# Altium PCB MainDesign_Small.PcbDoc
Units mm, origin at the board's own origin, x right, y up, seen from the top; angles counter-clockwise.
Board outline 20.1 x 20.19 mm, 2 copper layers (Top Layer, Bottom Layer); 49 components, 40 nets, 203 pads, 51 vias.
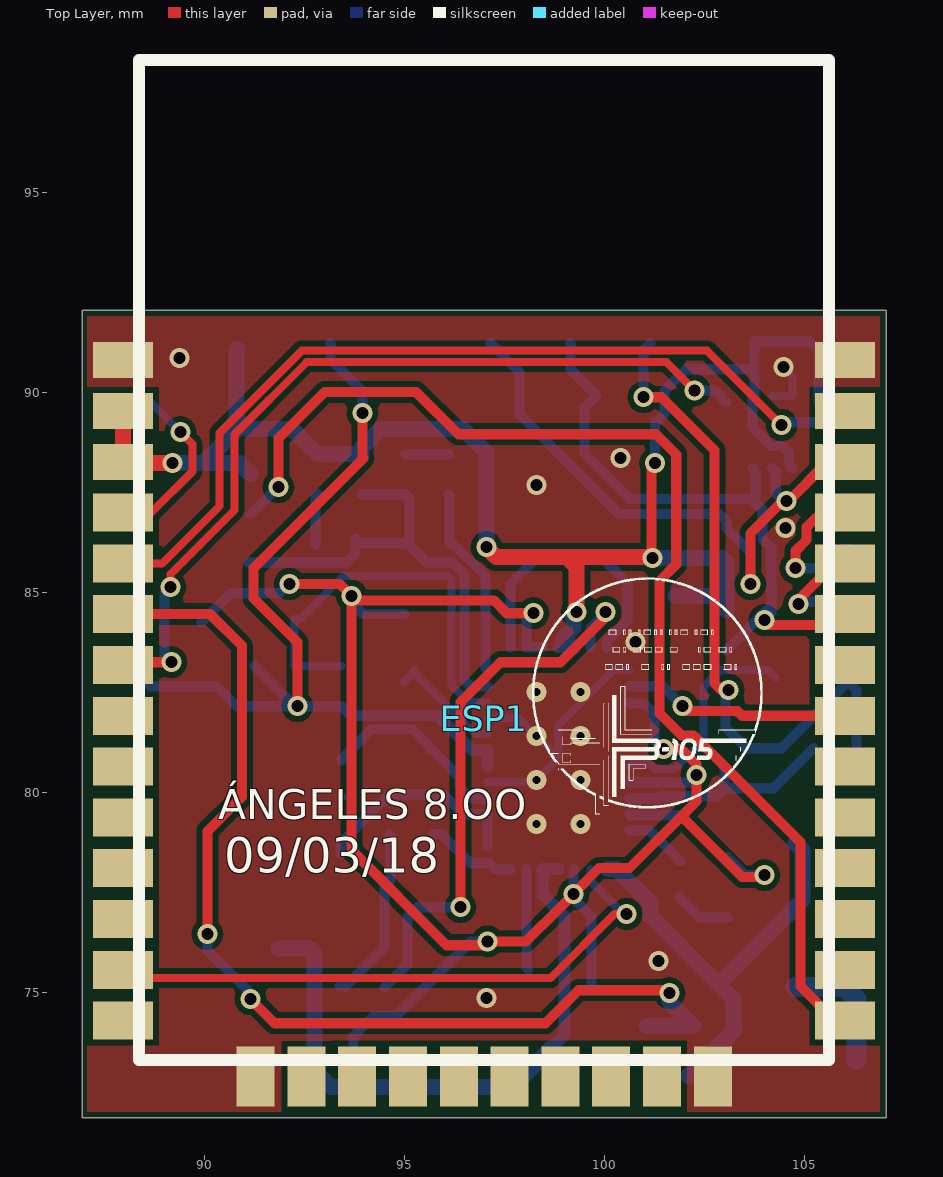
[diagram p0: Top Layer view]
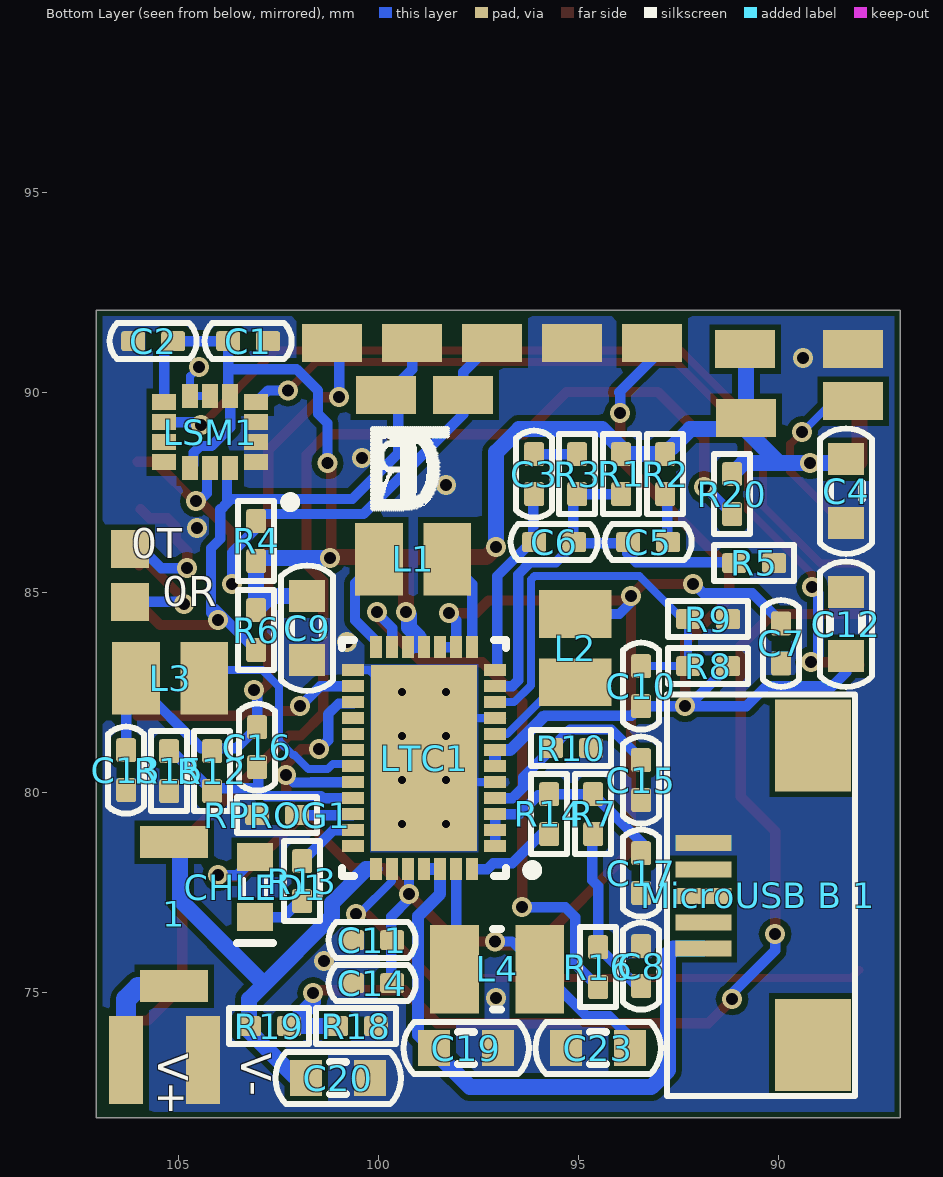
[diagram p1: Bottom Layer view, seen from below]
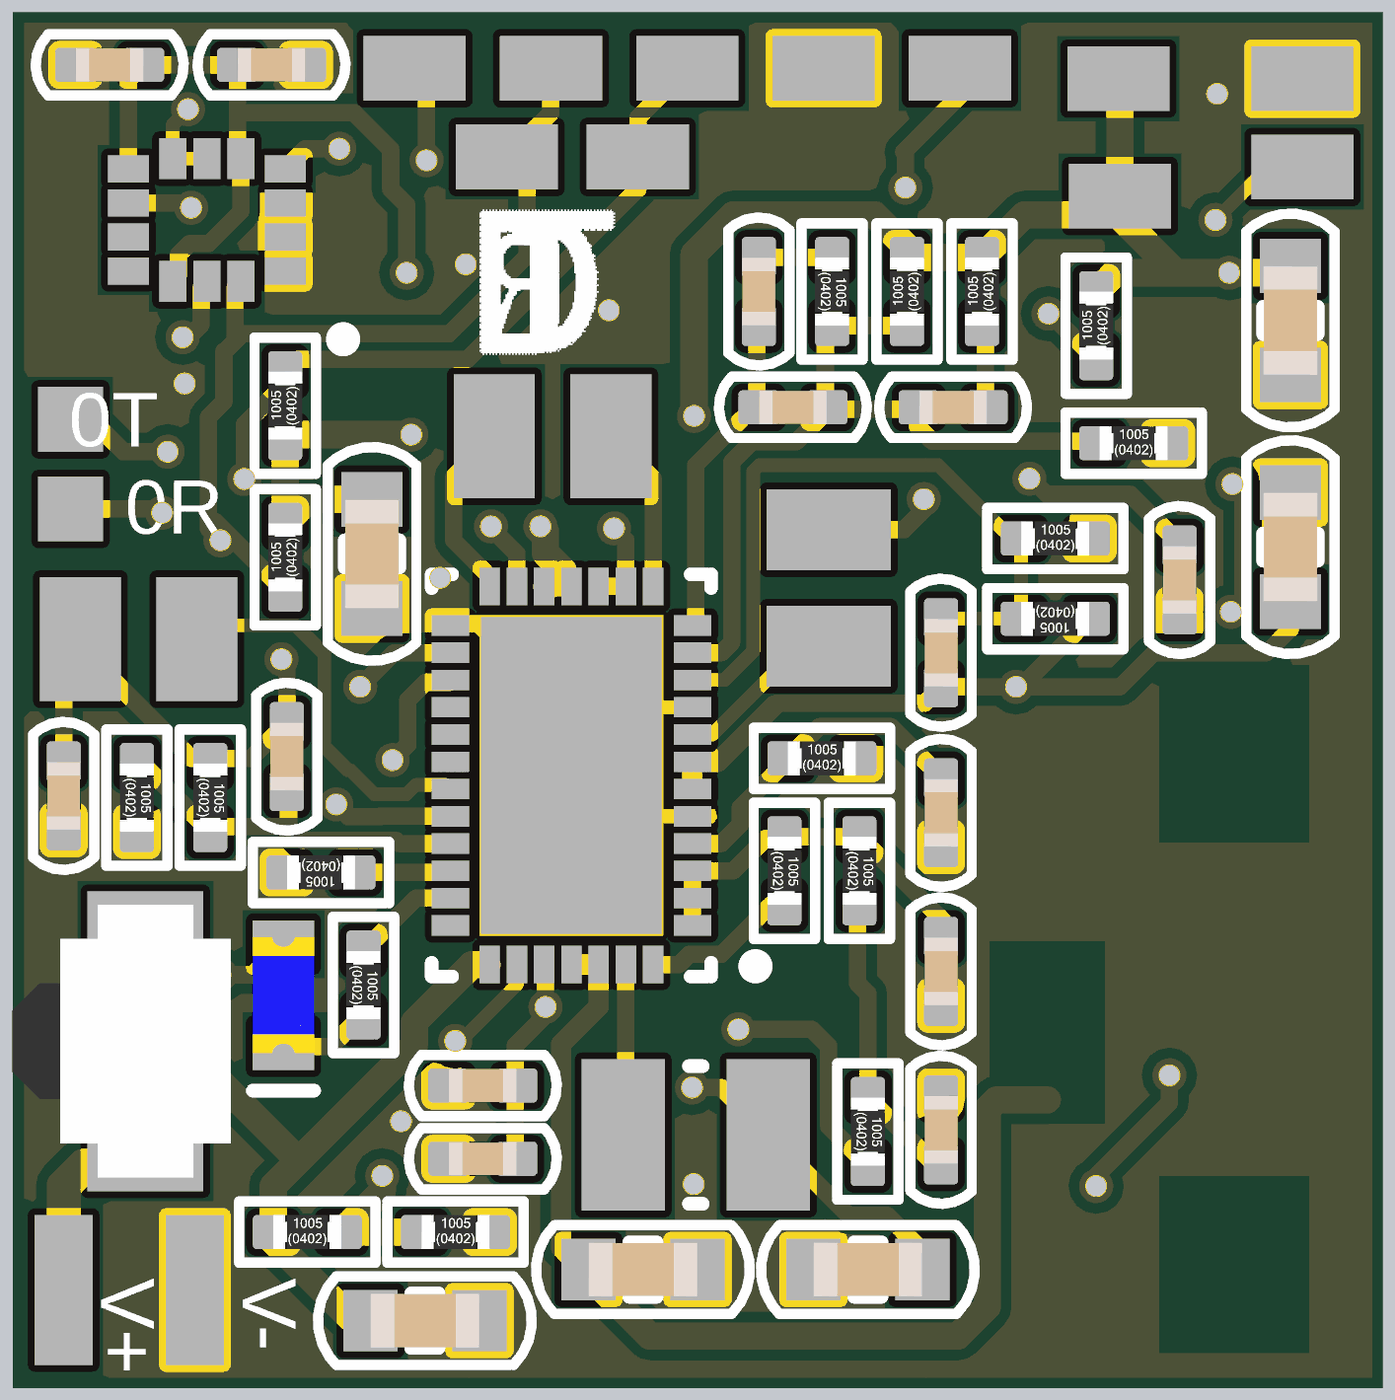
[diagram p2: 3D render of the assembled board from below, using the file's embedded part models]

## Layer stack, top to bottom
Top Solder: solder mask 0.0102, Solder Resist, Dk 3.5
Top Layer: signal copper 0.0356
Dielectric 1: dielectric 0.32, FR-4, Dk 4.8
Bottom Layer: signal copper 0.0356
Bottom Solder: solder mask 0.0102, Solder Resist, Dk 3.5

## Board outline
86.944,71.857 86.944,92.05 107.048,92.05 107.048,71.857

## Design rules (kind name [scope] priority, off if disabled: settings)
Clearance [All] p1: gap=0.15 ignorepadtopadclearanceinfootprint=TRUE except(0: Arc-Hole Track-Hole SMDPad-Hole THPad-Hole Via-Hole Fill-Hole Poly-Hole Region-Hole Text-Hole; 0.09: Arc-Arc Arc-Track Arc-SMDPad Track-Track Track-SMDPad SMDPad-SMDPad)
ComponentClearance VbatClearance [InComponent('10114830')] p1: gap=0.01 collisioncheckmode=3 verticalgap=0.01 showdistances=FALSE
ComponentClearance ComponentClearance_1 [All] p2: gap=0.254 collisioncheckmode=3 verticalgap=0.254 showdistances=FALSE
HoleSize [All] p1: absolutevalues=TRUE maxlimit=6.3 minlimit=0.3 maxpercent=80.000 minpercent=20.000
MinimumSolderMaskSliver [All] p1: minsoldermaskwidth=0.05
PolygonConnect [All] p1: connectstyle=Direct reliefconductorwidth=0.25 reliefentries=4 polygonreliefangle="90 Angle" airgapwidth=0.3
RoutingVias [All] p1: holewidth=0.3 width=0.6 viastyle="Through Hole" minholewidth=0.3 minwidth=0.6 maxholewidth=6.3 maxwidth=10.6
SilkToSilkClearance [All] p1: silktosilkclearance=0
SilkToSolderMaskClearance [IsPad] p1: minsilkscreentomaskgap=0 clearancetoexposedcopper=TRUE
SolderMaskExpansion [All] p1: expansion=0.102
Width [All] p1: maxlimit=10 minlimit=0.15 preferedwidth=0.25
25 further rules are at their usual default settings.

## Components (designator, comment, footprint, x,y, rotation, side; value= is the part's Value field where it differs from the comment)
1 "B3U-3000P" B3U-3000P 106.05,76.775 r90 bottom
C1 "Cap" "0402 CAP" 103.25,91.275 r0 bottom value=100n (schematic designator C4)
C2 "Cap" "0402 CAP" 105.625,91.275 r180 bottom value=100n (schematic designator C3)
C3 "Cap" "0402 CAP" 96.1,87.95 r270 bottom value=330p (schematic designator C19)
C4 "Cap" "0603 Cap" 88.3,87.525 r90 bottom value=100u (schematic designator C5)
C5 "Cap" "0402 CAP" 93.25,86.25 r0 bottom value=33p (schematic designator C23)
C6 "Cap" "0402 CAP" 95.6,86.25 r0 bottom value=10p (schematic designator C20)
C7 "Cap" "0402 CAP" 89.925,83.717 r90 bottom value=2.2u (schematic designator C22)
C8 "Cap" "0402 CAP" 93.425,75.65 r270 bottom value=100n
C9 "Cap" "0603 Cap" 101.775,84.1 r90 bottom value=100u (schematic designator C21)
C10 "Cap" "0402 CAP" 93.425,82.65 r270 bottom value=10p (schematic designator C16)
C11 "Cap" "0402 CAP" 100.15,76.3 r0 bottom value=1u (schematic designator C18)
C12 "Cap" "0603 Cap" 88.3,84.2 r270 bottom value=100u (schematic designator C15)
C13 "Cap" "0402 CAP" 106.3,80.55 r90 bottom value=10u (schematic designator C14)
C14 "Cap" "0402 CAP" 100.15,75.225 r180 bottom value=10u (schematic designator C17)
C15 "Cap" "0402 CAP" 93.425,80.3 r90 bottom value=100n (schematic designator C12)
C16 "Cap" "0402 CAP" 103.025,81.125 r90 bottom value=10p (schematic designator C13)
C17 "Cap" "0402 CAP" 93.425,77.975 r90 bottom value=1u (schematic designator C11)
C19 "Cap" "0603 Cap" 97.8,73.6 r0 bottom value=100u (schematic designator C6)
C20 "Cap" "0603 Cap" 101,72.85 r180 bottom value=100u (schematic designator C9)
C23 "Cap" "0603 Cap" 94.5,73.6 r180 bottom value=100u (schematic designator C7)
CHLED1 "LED" "0603 LED-BLUE" 103.075,77.625 r270 bottom
ESP1 "ESP32" ESP32 94.97,85.8 r0 top locked
L1 "L?" "Inductor 0806 [2016]" 99.125,85.825 r0 bottom value=2.2u (schematic designator L4)
L2 "L?" "Inductor 0806 [2016]" 95.075,83.6 r90 bottom value=2.2u (schematic designator L3)
L3 "L?" "Inductor 0806 [2016]" 105.2,82.85 r0 bottom value=4.7u (schematic designator L2)
L4 "L?" "Inductor 1008 [2520]" 97.025,75.575 r180 bottom value=3.3u (schematic designator L1)
LSM1 "LSM6DS3" LSM6DS3 104.2,89 r0 bottom
LTC1 "LTC3586" LTC3586/LTC3586-1 98.85,80.85 r0 bottom
"MicroUSB B 1" "MicroUSB B 2.0" "MicroUSB B 2.0" 188.261,172.608 r90 bottom (schematic designator "MicroUSB B 2.0")
R1 "Res" "0402 Res" 93.925,87.95 r90 bottom value=324K (schematic designator R18)
R2 "Res" "0402 Res" 92.825,87.95 r90 bottom value=121K (schematic designator R20)
R3 "Res" "0402 Res" 95.025,87.95 r270 bottom value=15K (schematic designator R17)
R4 "Res" "0402 Res" 103.05,86.275 r90 bottom value=1K (schematic designator R1)
R5 "Res" "0402 Res" 90.6,85.725 r180 bottom value=105K (schematic designator R19)
R6 "Res" "0402 Res" 103.05,84.05 r90 bottom value=1K (schematic designator R3)
R7 "Res" "0402 Res" 94.625,79.45 r270 bottom value=1K (schematic designator R2)
R8 "Res" "0402 Res" 91.75,83.15 r0 bottom value=88k7 (schematic designator R14)
R9 "Res" "0402 Res" 91.75,84.325 r180 bottom value=16k9 (schematic designator R16)
R10 "Res" "0402 Res" 95.175,81.1 r180 bottom value=2K87 (schematic designator R12)
R12 "Res" "0402 Res" 104.15,80.525 r270 bottom value=1M02 (schematic designator R13)
R13 "Res" "0402 Res" 101.9,77.775 r270 bottom value=1K (schematic designator R8)
R14 "Res" "0402 Res" 95.725,79.45 r270 bottom value=10K (schematic designator R6)
R15 "Res" "0402 Res" 105.225,80.525 r270 bottom value=806K
R16 "Res" "0402 Res" 94.5,75.625 r270 bottom value=0 (schematic designator R9)
R18 "Res" "0402 Res" 100.55,74.15 r180 bottom value=4K3 (schematic designator R5)
R19 "Res" "0402 Res" 102.725,74.15 r180 bottom value=10K (schematic designator R4)
R20 "Res" "0402 Res" 91.15,87.45 r90 bottom value=0 (schematic designator R10)
RPROG1 "Res" "0402 Res" 102.525,79.425 r0 bottom value=3K57

## Footprints (in the part's own frame and the unit in brackets; to place one, negate y for a bottom-side part, rotate by r counter-clockwise, add the part's x,y. Pads: shape width x height; smd on the part's side, far side on the other; paste and mask are expansions set on the pad)
"0402 CAP" [mm] "Chip Capacitor, Body 1.0x0.5mm, IPC High Density"
  rrect25% 0.6x0.5 smd: 1(-0.5,0) 2(0.5,0)
  Top Layer pour cut-out: -0.2,0.25 -0.2,-0.25 0.2,-0.25 0.2,0.25
  silkscreen extent -1.09,-0.45 1.09,0.45, body extent -0.5,-0.25 0.5,0.25, height 0.49
"0402 Res" [mm] "Chip Resistor, Body 1.0x0.5mm, IPC High Density"
  rrect25% 0.6x0.5 smd: 1(-0.5,0) 2(0.5,0)
  Top Layer pour cut-out: -0.2,0.25 -0.2,-0.25 0.2,-0.25 0.2,0.25
  silkscreen extent -1,-0.45 1,0.45, body extent -0.5,-0.25 0.5,0.25, height 0.35
"0603 Cap" [mm] "Chip Capacitor, Body 1.6x0.8mm, IPC High Density"
  rect 0.8x0.9 smd: 1(-0.8,0) 2(0.8,0)
  silkscreen extent -1.57,-0.65 1.57,0.65, body extent -0.8,-0.4 0.8,0.4, height 0.78
"0603 LED-BLUE" [mm] "LED, Body 1.6x0.8mm, IPC High Density"
  rect 0.7x0.9 smd: 1(-0.75,0) 2(0.75,0)
  silkscreen extent -0.2,-0.45 1.4,0.45, body extent -0.85,-0.45 0.85,0.45, height 0.9
B3U-3000P [mm]
  rect 0.8x1.7 smd: 1(1.975,-0.95) 2(-1.625,-0.95)
  body extent -1.82,-2.2 2.18,1, height 1.2
ESP32 [mm]
  rect 1.5x0.9 smd: 1(-7,5) 2(-7,3.73) 3(-7,2.46) 36(11.05,2.46) 37(11.05,3.73) 38(11.05,5)
  rect 1.5x0.95 smd: 4(-7,1.19) 5(-7,-0.08) 6(-7,-1.35) 7(-7,-2.62) 8(-7,-3.89) 9(-7,-5.16) 10(-7,-6.43) 11(-7,-7.7) 12(-7,-8.97) 13(-7,-10.24) 14(-7,-11.51) 25(11.05,-11.51) 26(11.05,-10.24) 27(11.05,-8.97) 28(11.05,-7.7) 29(11.05,-6.43) 30(11.05,-5.16) 31(11.05,-3.89) 32(11.05,-2.62) 33(11.05,-1.35) 34(11.05,-0.08) 35(11.05,1.19)
  rect 0.95x1.5 smd: 15(-3.69,-12.91) 16(-2.42,-12.91) 17(-1.15,-12.91) 18(0.12,-12.91) 19(1.39,-12.91) 20(2.66,-12.91) 21(3.93,-12.91) 22(5.2,-12.91) 23(6.47,-12.91) 24(7.74,-12.91)
  silkscreen extent -6.6,-12.5 10.65,12.5, body extent -6.63,-12.5 10.68,12.55, height 2
"Inductor 0806 [2016]" [mm]
  rect 1.19x1.82 smd: 1(-0.855,0) 2(0.855,0)
  body extent -1.1,-0.9 1.1,0.9, height 1
"Inductor 1008 [2520]" [mm]
  rect 1.22x2.22 smd: 1(-1.065,0) 2(1.065,0)
  silkscreen extent -0.1,-1.01 0.1,1.01, body extent -1.3,-1.1 1.3,1.1, height 1
LSM6DS3 [mm]
  rect 0.6x0.4 smd: 1(-1.15,0.75) 2(-1.15,0.25) 3(-1.15,-0.25) 4(-1.15,-0.75) 8(1.15,-0.75) 9(1.15,-0.25) 10(1.15,0.25) 11(1.15,0.75)
  rect 0.4x0.6 smd: 5(-0.5,-0.9) 6(0,-0.9) 7(0.5,-0.9) 12(0.5,0.9) 13(0,0.9) 14(-0.5,0.9)
  silkscreen extent -2.12,1.63 -1.88,1.87, body extent -1.55,-1.3 1.55,1.3, height 0.86
LTC3586/LTC3586-1 [mm]
  rect 0.55x0.3 smd: 1(-1.775,2.2) 2(-1.775,1.8) 3(-1.775,1.4) 4(-1.775,1) 5(-1.775,0.6) 6(-1.775,0.2) 7(-1.775,-0.2) 8(-1.775,-0.6) 9(-1.775,-1) 10(-1.775,-1.4) 11(-1.775,-1.8) 12(-1.775,-2.2) 20(1.775,-2.2) 21(1.775,-1.8) 22(1.775,-1.4) 23(1.775,-1) 24(1.775,-0.6) 25(1.775,-0.2) 26(1.775,0.2) 27(1.775,0.6) 28(1.775,1) 29(1.775,1.4) 30(1.775,1.8) 31(1.775,2.2)
  rect 0.3x0.55 smd: 13(-1.2,-2.775) 14(-0.8,-2.775) 15(-0.4,-2.775) 16(0,-2.775) 17(0.4,-2.775) 18(0.8,-2.775) 19(1.2,-2.775) 32(1.2,2.775) 33(0.8,2.775) 34(0.4,2.775) 35(0,2.775) 36(-0.4,2.775) 37(-0.8,2.775) 38(-1.2,2.775)
  rect 2.65x4.65 smd: 39(0,0)
  silkscreen extent -2.82,-2.95 2.05,2.95, body extent -2.05,-2.95 2.05,2.95, height 0.8
"MicroUSB B 2.0" [mm]
  rect 2.3x1.9 smd: 0(-98.933,-99.136) 0(-91.44,-99.136)
  rect 0.4x1.4 smd: 1(-96.52,-96.393) 2(-95.86,-96.393) 3(-95.199,-96.393) 4(-94.539,-96.393) 5(-93.878,-96.393)
  silkscreen extent -100.2,-100.18 -90.17,-95.48, body extent -99.6,-101.99 -90.8,-96.39, height 2.89

## Part data
L1 L2 L3 L4: library part Ind
LSM1: Supplier Part Number 1=497-15383-1-ND, Supplier 1=Digi-Key
LTC1: library part LTC3586/LTC3586-1

## Free pads (board coordinates)
  rect 1.5x0.95 smd far side: 5(88.125,89.775) 5(88.125,91.075) 5(90.8,89.35) 5(90.825,91.075) 5(93.15,91.225) 5(95.15,91.225) 5(97.15,91.225) 5(97.875,89.925) 5(99.15,91.225) 5(99.8,89.925) 5(101.15,91.225)
  rect 0.95x0.95 smd far side: 5(106.2,84.76) 5(106.2,86.075)
  rect 0.85x2.2 smd far side: 6(104.375,73.3) 7(106.3,73.3)

## Via types
v1: diameter 0.5, hole 0.3, Top Layer to Bottom Layer, tented both sides, 43 vias
v2: diameter 0.5, hole 0.2, Top Layer to Bottom Layer, tented top, 8 vias

## Nets (pads, with @x,y where several pads share a name; then routed paths per layer and width w, separated by ;. In a path a pad name is that pad's centre, name@x,y a point inside that pad or via, vN(x,y) a via of type N, cw(c..) or ccw(c..) an arc to the next point about the centre after c; other vN are vias at no path point)
1.8V: C13.2 C16.2 L3.2 pad.5@101.15,91.225 R12.1 | length 16.8
  Top Layer w0.254: v1(100.975,89.875) 101.425,89.875 102.75,88.55 102.75,82.725 102.921,82.554 v1(103.105,82.554)
  Bottom Layer w0.254: v1(100.975,89.875) 100.975,91.05 pad.5@101.15,91.225 ; v1(103.105,82.554) 103.025,82.474 C16.2 103.55,81.1 104.425,81.1 106.005,82.68 106.005,82.85 106.3,82.555 C13.2@106.3,81.125
3.3V: C1.2 C2.2 C4.2 C9.2 ESP1.2 ESP1.3 LSM1.5 LSM1.8 LSM1.12 LTC1.16 LTC1.17 pad.5@90.8,89.35 pad.5@90.825,91.075 R1.2 R2.2 R4.1 R6.2 R20.2 | length 43.2
  Top Layer w0.254: v1@101.175,85.875 101.175,88.133 v1(101.267,88.225)
  Top Layer w0.4: ESP1.2 ESP1.3 88.005,88.225 v1(89.2,88.225) ; v1(97.05,86.125) 97.3,85.875 99.238,85.875 ; v1(99.305,84.504) 99.305,85.633 99.15,85.787 99.238,85.875 ; v1@101.175,85.875 99.238,85.875
  Bottom Layer w0.254: LTC1.17@99.21,83.625 LTC1.17 ; v1(101.267,88.225) 101.267,89.222 101.502,89.457 101.502,90.037 102.04,90.575 103.75,90.575 ; LSM1.12 104.617,88.183 104.617,88.49 104.455,88.652 104.173,88.652 103.7,89.125 LSM1.5 103.75,89.95 103.75,90.575 ; LSM1.8 105.35,91.05 C2.2 C1.2 103.75,90.575
  Bottom Layer w0.3: LTC1.16 LTC1.17@99.21,83.625
  Bottom Layer w0.4: C4.2 88.4,88.225 v1(89.2,88.225) 90.075,88.225 ; pad.5@90.825,91.075 90.8,91.05 pad.5@90.8,89.35 ; R20.2 90.875,88.225 90.075,88.225 ; R2.2@92.675,88.6 92.2,89.075 91.075,89.075 pad.5@90.8,89.35 ; R2.2 R1.2 ; R1.2@93.95,88.626 94.399,89.075 96.475,89.075 97.05,88.5 v1(97.05,86.125) ; LTC1.17@99.21,83.625 98.975,83.86 99.233,84.118 99.233,84.432 v1(99.305,84.504) ; v1(101.2,85.85) 102.95,85.85 103.05,85.75 R6.2 102.7,84.9 C9.2 ; 90.075,88.225 90.025,88.275 90.8,89.05 pad.5@90.8,89.35
5V: C10.2 C12.2 LTC1.6 LTC1.7 pad.5@93.15,91.225 R8.1 | length 22.8
  Top Layer w0.254: v1(92.325,82.15) 92.325,83.75 91.225,84.85 91.225,85.6 93.975,88.35 93.95,88.375 v1(93.95,89.475)
  Bottom Layer w0.254: C12.2 88.3,83 88.65,82.65 90.3,82.65 90.8,82.15 v1@92.25,82.15 ; R8.1 v1@92.25,82.15 ; pad.5@93.15,91.225 93.15,90.825 93.975,90 93.95,89.975 v1(93.95,89.475) ; 95.875,81.875 95.839,81.911 93.664,81.911 C10.2 v1(92.325,82.15) v1@92.25,82.15
  Bottom Layer w0.3: 95.875,81.875 96.7,81.05 LTC1.7 LTC1.6
EN1_EN3: C8.2 R7.2 R16.1 | length 4.4
  Bottom Layer w0.254: C8.2@93.375,75.15 93.525,75.15 R16.1 94.5,77.65 94.65,77.8 94.65,78.925 R7.2
GND: "MicroUSB B 1.5" C1.1 C2.1 C4.1 C7.1 C8.1 C9.1 C11.2 C12.1 C13.1 C14.1 C15.1 C17.1 C19.1 C20.2 C23.1 ESP1.1 ESP1.15 ESP1.24 ESP1.38 LSM1.1 LSM1.2 LSM1.3 LSM1.6 LSM1.7 LTC1.5 LTC1.9 LTC1.20 LTC1.39 pad.5@88.125,91.075 pad.5@95.15,91.225 pad.6 R5.2 R9.2 R10.2 R15.2 R18.2 RPROG1.2 | length 8.7
  Bottom Layer w0.2: C15.1@93.425,79.875 C15.1@93.45,79.875 ; LTC1.5 98.25,80.25 v2(98.3,80.3) LTC1.39 ; LTC1.9 97.85,81.85 LTC1.39 ; LTC1.20 100.225,83.05 98.85,81.675 LTC1.39 ; LSM1.6 LSM1.7 104.7,90.4 v1(104.475,90.625)
  other v1: 97.055,74.854 101.35,75.775 100.775,83.75 104.525,86.6 98.3,87.675 100.4,88.35 89.375,90.85
  other v2: 98.3,79.2 99.4,79.2 99.4,80.3 98.3,81.4 99.4,81.4 98.3,82.5 99.4,82.5
INT_MAX30102: ESP1.4 pad.5@88.125,89.775 | length 4.8
  Top Layer w0.2: ESP1.4 88.672,86.99 89.7,88.018 89.7,88.7 v1(89.4,89)
  Bottom Layer w0.2: pad.5@88.175,89.775 88.625,89.775 v1(89.4,89)
LDO3V3: C17.2 LTC1.1 LTC1.2 LTC1.3 R7.1 R14.1 | length 5.5
  Bottom Layer w0.254: C17.2@93.4,78.475 93.4,78.725 R7.1 R14.1 ; R14.1@95.65,79.925 96,79.925 96.475,79.45 LTC1.3 LTC1.2 LTC1.1
Net1_2: 1.2 pad.7 | length 3.2
  Bottom Layer w0.5: 1.2@104.775,75.125 106,75.125 106.3,74.825 pad.7
NetC3_1: C3.1 R3.1 | length 1.1
  Bottom Layer w0.254: R3.1 C3.1
NetC3_2: C3.2 C6.2 LTC1.12 | length 4.9
  Bottom Layer w0.254: C3.2 96.125,87.425 C6.2@96.125,86.225 ; C6.2@96.14,86.29 97.025,85.405 97.025,83.1 LTC1.12
NetC5_1: C5.1 R2.1 | length 1.3
  Bottom Layer w0.254: C5.1@92.775,86.2 92.775,87.4 R2.1
NetC5_2: C5.2 C6.1 LTC1.11 R1.1 R3.2 R5.1 | length 11.8
  Bottom Layer w0.254: R5.1@91.1,85.75 93.55,85.75 93.775,85.975 C5.2@93.775,86.2 ; C5.2@93.775,86.325 C5.2@93.775,86.2 ; R1.1 R3.2 95.125,87.35 C6.1@95.125,86.225 ; LTC1.11 96.65,82.65 96.5,82.8 96.5,85.443 96.198,85.745 95.555,85.745 95.075,86.225 93.8,86.225 C5.2@93.775,86.2
NetC7_2: C7.2 C11.1 C14.2 C23.2 CHLED1.1 L2.2 L4.2 LTC1.14 LTC1.15 LTC1.22 LTC1.27 LTC1.34 | length 46.3
  Top Layer w0.254: v1(92.129,85.204) 93.375,85.204 93.375,85.209 v1(93.68,84.904) v1@93.68,84.795 ; v1(98.225,84.475) 97.559,84.475 97.238,84.795 v1@93.68,84.795 ; v1(101.475,81.075) 101.925,81.075 102.3,80.7 v1(102.3,80.425) 102.3,79.775 101.925,79.4 ; v1(104,77.925) 103.956,77.881 103.444,77.881 101.925,79.4 ; v1@93.68,84.795 93.68,78.545 96.05,76.175 96.984,76.175 v1(97.08,76.271) 98.038,76.271 98.446,76.679 98.451,76.674 v1(99.23,77.454) 99.23,77.469 99.864,78.104 100.629,78.104 101.925,79.4
  Bottom Layer w0.254: C7.2@89.925,84.25 90.65,84.975 91.875,84.975 92.104,85.204 v1(92.129,85.204) ; v1(93.68,84.904) 93.68,84.795 93.655,84.77 93.97,84.455 L2.2@95,84.455 ; C23.2@93.725,73.6 93.725,73.9 94.225,74.4 94.785,74.4 L4.2 96.656,76.271 v1(97.08,76.271) ; v1(98.225,84.475) 98.05,84.3 LTC1.14 LTC1.15 ; LTC1.34 99.23,78.055 v1(99.23,77.454) 99.23,77.334 99.675,76.888 99.675,76.3 C14.2@99.675,75.175 ; LTC1.27 101.666,80.25 101.658,80.242 102.117,80.242 v1(102.3,80.425) ; LTC1.22 100.625,82.217 100.99,82.217 101.25,81.957 101.25,81.3 v1(101.475,81.075) ; CHLED1.1 103.525,77.925 v1(104,77.925)
NetC10_1: C10.1 LTC1.10 R8.2 R9.1 | length 10.5
  Bottom Layer w0.2: C10.1 R8.2 R9.1 92.393,84.325 93.472,85.404 96.091,85.404 96.183,85.312 96.183,82.669 96.602,82.25 LTC1.10
NetC15_2: C15.2 LTC1.4 R10.1 | length 4.9
  Bottom Layer w0.254: C15.2 93.425,80.825 94.167,81.567 95.208,81.567 R10.1 95.65,81.075 95.675,81.075 96.375,80.375 96.375,80.125 96.65,79.85 LTC1.4
NetC16_1: C16.1 LTC1.28 R12.2 R15.1 | length 5.7
  Bottom Layer w0.254: LTC1.28@100.625,79.846 LTC1.28@100.643,79.828 ; LTC1.28 101.379,79.85 101.427,79.898 102.798,79.898 103,80.1 ; C16.1 103,80.6 103,80.1 ; R15.1@105.225,81.1 104.225,80.1 103,80.1
NetC19_2: "MicroUSB B 1.1" C19.2 LTC1.35 LTC1.36 | length 15.6
  Bottom Layer w0.3: C19.2@98.675,73.6 99,73.925 99,76.906 98.45,77.456 LTC1.36 LTC1.35
  Bottom Layer w0.4: 91.868,76.088 92.612,76.088 92.75,75.95 92.75,73.05 93.175,72.625 97.7,72.625 C19.2@98.675,73.6
NetCHLED1_2: CHLED1.2 R13.2 | length 1.4
  Bottom Layer w0.254: R13.2@101.875,77.375 102.375,76.875 CHLED1.2
NetESP1_5: ESP1.5 LSM1.9 | length 21.5
  Top Layer w0.2: ESP1.5 88.945,85.72 90.375,87.15 90.375,88.979 92.436,91.04 102.56,91.04 104.421,89.179 v1(104.43,89.179)
  Bottom Layer w0.254: v1(104.43,89.179) 104.501,89.25 LSM1.9
NetESP1_6: ESP1.6 R18.1 R19.2 | length 26.3
  Top Layer w0.254: ESP1.6 87.972,84.452 90.148,84.452 90.937,83.663 90.937,79.887 90.075,79.025 v1(90.075,76.45) ; v1(91.15,74.825) 91.75,74.225 98.525,74.225 99.35,75.05 101.55,75.05 v1(101.625,74.975)
  Bottom Layer w0.254: v1(90.075,76.45) 90.075,76.05 91.15,74.975 v1(91.15,74.825)
  Bottom Layer w0.4: R18.1 R19.2 101.625,74.75 v1(101.625,74.975)
NetESP1_7: ESP1.7 LSM1.4 | length 21.2
  Top Layer w0.2: v1(89.15,85.125) 89.15,85.45 90.75,87.05 90.75,88.944 92.556,90.75 101.55,90.75 v1(102.255,90.045)
  Top Layer w0.254: ESP1.7 88.04,83.25 v1(89.175,83.25)
  Bottom Layer w0.254: v1(89.15,85.125) 89,84.975 89,83.425 v1(89.175,83.25) ; v1(102.255,90.045) 102.755,90.045 LSM1.4
NetESP1_13: ESP1.13 LTC1.33 | length 14.9
  Top Layer w0.2: ESP1.13 88.18,75.35 96.844,75.35 96.848,75.354 97.262,75.354 97.265,75.35 98.65,75.35 100.254,76.954 v1(100.555,76.954)
  Bottom Layer w0.2: LTC1.33 99.65,77.781 100.478,76.954 v1(100.555,76.954)
NetESP1_17: ESP1.17
NetESP1_18: ESP1.18
NetESP1_25: ESP1.25 R20.1 | length 29.9
  Top Layer w0.254: v1(91.85,87.625) 91.85,88.85 93.002,90.002 95.298,90.002 96.35,88.95 101.287,88.95 101.794,88.443 101.794,85.699 101.375,85.28 101.375,81.975 101.931,81.419 102.231,81.419 104.9,78.75 104.9,75.148 105.758,74.29 ESP1.25
  Bottom Layer w0.254: R20.1 91.825,87.625 v1(91.85,87.625)
NetESP1_31: ESP1.31 LTC1.21 | length 5.7
  Top Layer w0.254: v1(101.95,82.15) 102.073,82.027 103.323,82.027 103.44,81.91 ESP1.31
  Bottom Layer w0.254: LTC1.21 101.45,82.65 v1(101.95,82.15)
NetESP1_34: ESP1.34 pad.5@106.2,84.76 | length 3.1
  Top Layer w0.254: v1(104.855,84.704) 104.855,84.817 105.844,85.806 105.975,85.675 ESP1.34
  Bottom Layer w0.254: v1(104.855,84.704) 104.911,84.76 pad.5@106.2,84.76
NetESP1_35: ESP1.35 pad.5@106.2,86.075 | length 3.8
  Top Layer w0.254: v1(104.775,85.6) 104.775,86.025 104.773,86.027 105.052,86.306 105.052,86.627 105.275,86.85 105.71,86.85 ESP1.35@105.935,87.075
  Bottom Layer w0.254: v1(104.775,85.6) 105.425,85.6 105.9,86.075 pad.5@106.2,86.075
NetL1_1: L1.1 LTC1.13 | length 2.5
  Bottom Layer w0.254: LTC1.13 97.65,85.205 L1.1
NetL1_2: L1.2 LTC1.19 | length 2.7
  Bottom Layer w0.254: L1.2 100.577,85.228 100.577,84.297 100.05,83.77 LTC1.19
NetL2_1: L2.1 LTC1.8 | length 2.9
  Bottom Layer w0.2: L2.1@94.975,82.745 L2.1@95.25,83.02 ; L2.1@95.25,83.05 95.25,82.981 96.781,81.45 LTC1.8
NetL3_1: L3.1 LTC1.26 | length 5.7
  Bottom Layer w0.2: LTC1.26 100.685,80.71 101.133,80.71 101.268,80.575 101.743,80.575 102.093,80.925 102.125,80.925 102.48,81.28 102.48,81.911 102.475,81.916 102.475,82.631 102.898,83.054 104.091,83.054 L3.1@104.295,82.85
NetL4_1: L4.1 LTC1.37 | length 2.5
  Bottom Layer w0.254: LTC1.37 98.05,75.615 L4.1
NetLTC1_18: LTC1.18 R16.2 | length 14.2
  Top Layer w0.254: v1(96.4,77.125) 96.4,82.25 97.4,83.25 98.9,83.25 100.03,84.38 v1(100.03,84.504)
  Bottom Layer w0.254: R16.2 95.075,75.7 95.075,76.875 95.325,77.125 v1(96.4,77.125) ; LTC1.18 99.65,84.104 100.03,84.484 v1(100.03,84.504)
NetLTC1_29: LTC1.29 RPROG1.1 | length 1.4
  Bottom Layer w0.254: LTC1.29 100.65,79.425 RPROG1.1
NetLTC1_30: LTC1.30 R13.1 | length 1.6
  Bottom Layer w0.254: LTC1.30 101.125,79.05 R13.1
NetLTC1_38: LTC1.38 R14.2 | length 2.3
  Bottom Layer w0.254: R14.2 95.925,78.95 96.65,78.225 97.125,78.225 97.275,78.075 LTC1.38
SCL_I2C: ESP1.36 LSM1.13 pad.5@97.15,91.225 pad.5@97.875,89.925 R4.2 | length 15.6
  Top Layer w0.254: v1(103.65,85.2) 103.65,86.47 104.459,87.279 v1(104.555,87.279) 104.555,87.23 105.585,88.26 ESP1.36
  Bottom Layer w0.254: pad.5@97.15,91.225 97.875,90.5 97.875,89.925 97.875,89.45 100.373,86.952 102.873,86.952 R4.2 103.05,86.595 103.65,85.995 v1(103.65,85.2) ; LSM1.13 104.283,88.017 104.283,87.467 104.471,87.279 v1(104.555,87.279)
SDA_I2C: ESP1.33 LSM1.14 pad.5@99.8,89.925 pad.5@99.15,91.225 R6.1 | length 15.8
  Top Layer w0.254: v1(104,84.3) 104.123,84.177 105.447,84.177 105.87,84.6 ESP1.33
  Bottom Layer w0.254: pad.5@99.15,91.225 99.15,90.575 99.8,89.925 99.5,89.625 99.5,88.475 100.646,87.329 103.676,87.329 103.783,87.222 ; R6.1 104.075,84.575 ; LSM1.14 103.783,88.017 103.783,87.222 ; v1(104,84.3) 104.177,84.477 104.177,86.103 103.948,86.332 103.948,87.073 103.94,87.065 103.783,87.222
VBAT_P: 1.1 C20.1 LTC1.32 R19.1 | length 11.4
  Bottom Layer w0.4: LTC1.32@100.09,78.075 100.307,78.075 101.155,77.227 101.155,76.895 102.85,75.2 ; C20.1@102.1,72.9 R19.1@103.25,74.05 ; R19.1 103.225,74.825 102.85,75.2 ; 1.1@104.775,78.725 104.95,78.55 104.95,77.3 102.85,75.2
pads on no net: "MicroUSB B 1.0" "MicroUSB B 1.2" "MicroUSB B 1.3" "MicroUSB B 1.4" ESP1.8 ESP1.9 ESP1.10 ESP1.11 ESP1.12 ESP1.14 ESP1.16 ESP1.19 ESP1.20 ESP1.21 ESP1.22 ESP1.23 ESP1.26 ESP1.27 ESP1.28 ESP1.29 ESP1.30 ESP1.32 ESP1.37 LSM1.10 LSM1.11 LTC1.23 LTC1.24 LTC1.25 LTC1.31

## Polygon pours and split planes (outlines as drawn)
GND on Bottom Layer "GND_DOWN" (solid, remove dead copper, pour order 8): 106.883,91.897 106.883,81.153 106.883,72.009 87.097,72.009 87.097,91.897
GND on Top Layer "GND_UP" (solid, remove dead copper, pour order 6): 106.883,91.872 106.883,81.153 106.883,72.009 87.071,72.009 87.071,91.897 106.858,91.897

## Silkscreen, mask and mechanical layers (free items; w line width, h text height)
Top Overlay:
  drawing of 65 lines, arcs and shapes, not listed
  text "ÁNGELES 8.OO" at 90.35,79.075 h1.28
  text "09/03/18" at 90.5,77.7 h1.5
Bottom Overlay:
  region: 550 vertices and 6 holes, not listed, extent 98.211,87.021 100.2,89.154
  text "0T" at 106.175,85.6 h1.28
  text "0R" at 105.4,84.4 h1.28
  text "V-" at 103.675,73.475 h1.28 r90
  text "V+" at 105.75,73.475 h1.28 r90
Mechanical 1:
  the board outline again, w0.3